# Altium PCB V3Lights.PcbDoc
Units mm, origin at the board's own origin, x right, y up, seen from the top; angles counter-clockwise.
Board outline 80 x 50 mm, 2 copper layers (Top Layer, Bottom Layer), stack 1.671 mm thick; 31 components, 16 nets, 72 pads, 7 vias.
Unrouted connection lines stored in the file: 7.
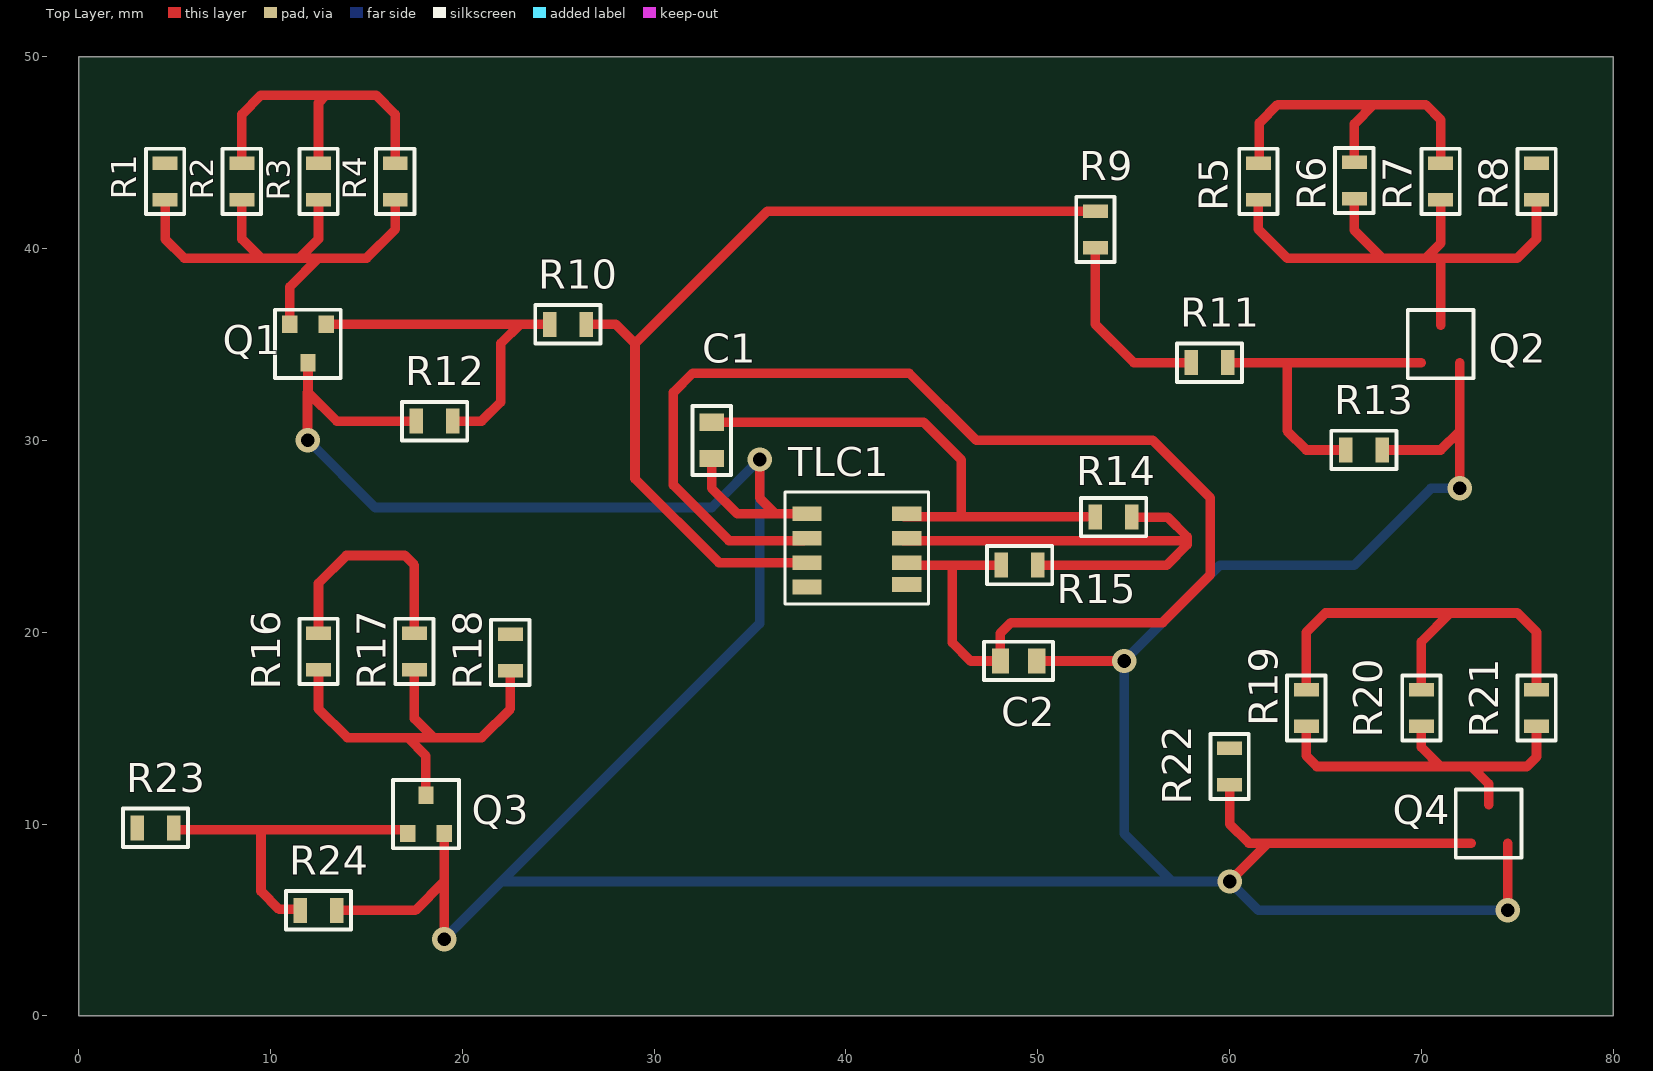
[diagram p0: Top Layer view]
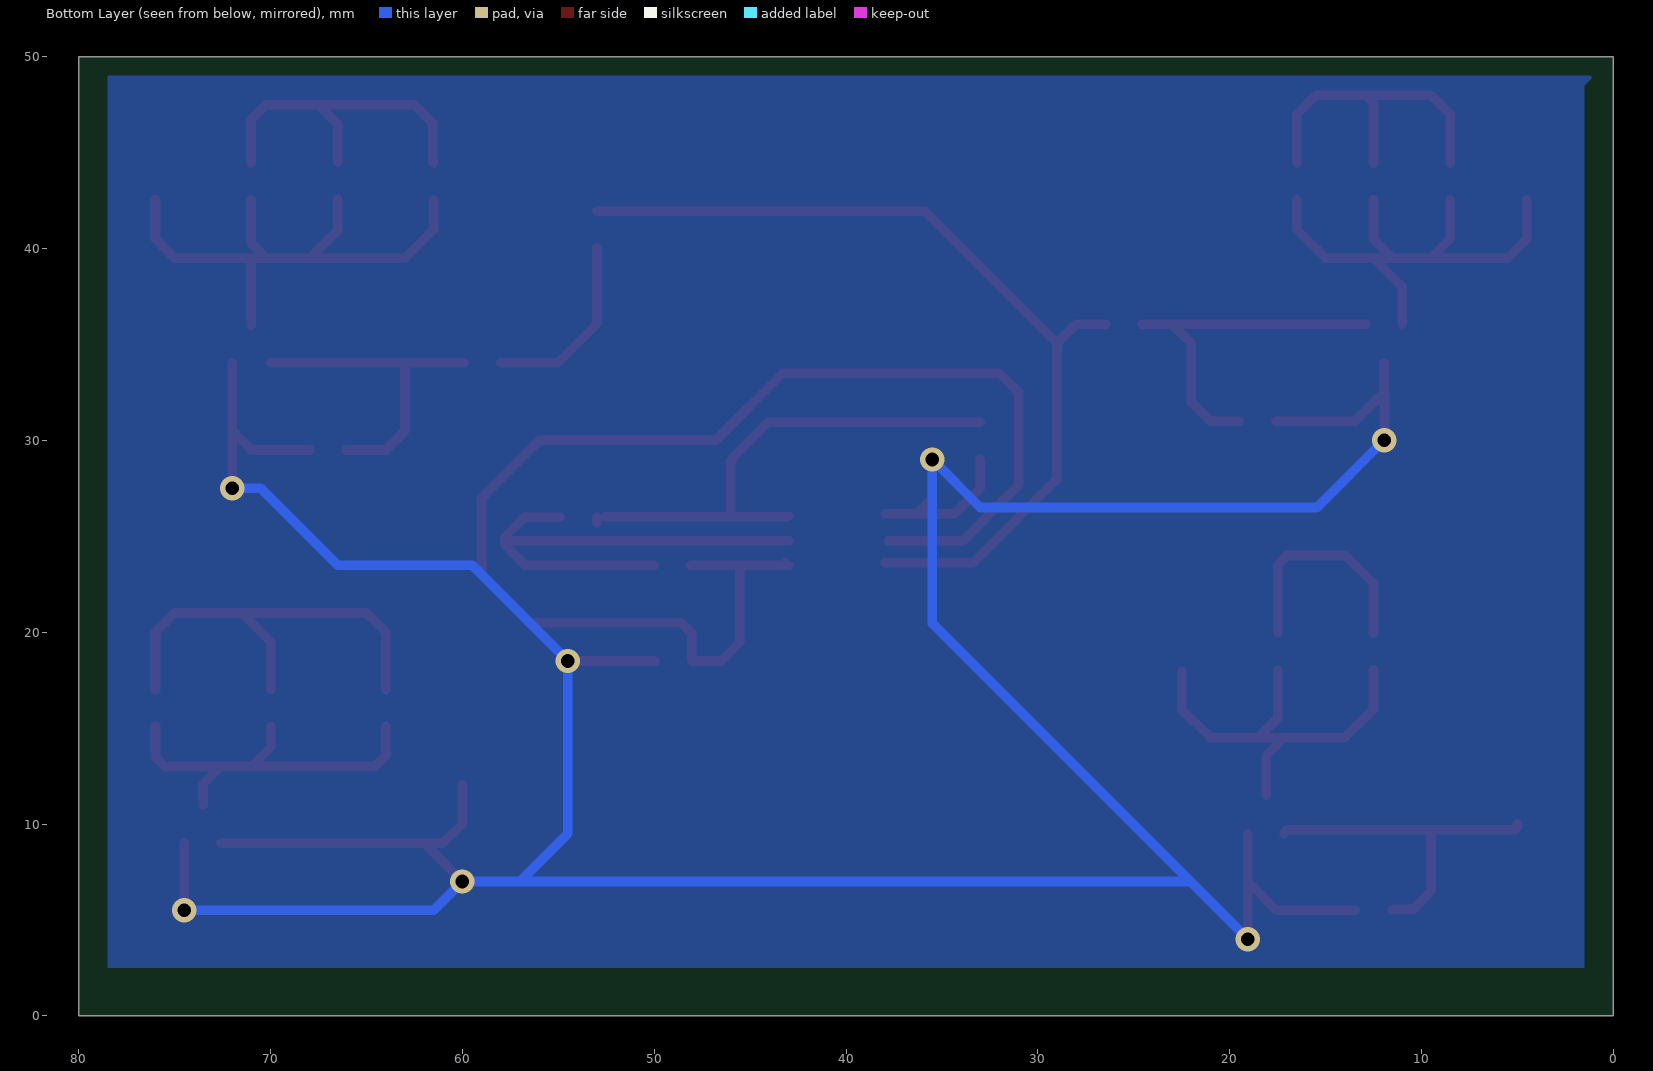
[diagram p1: Bottom Layer view, seen from below]
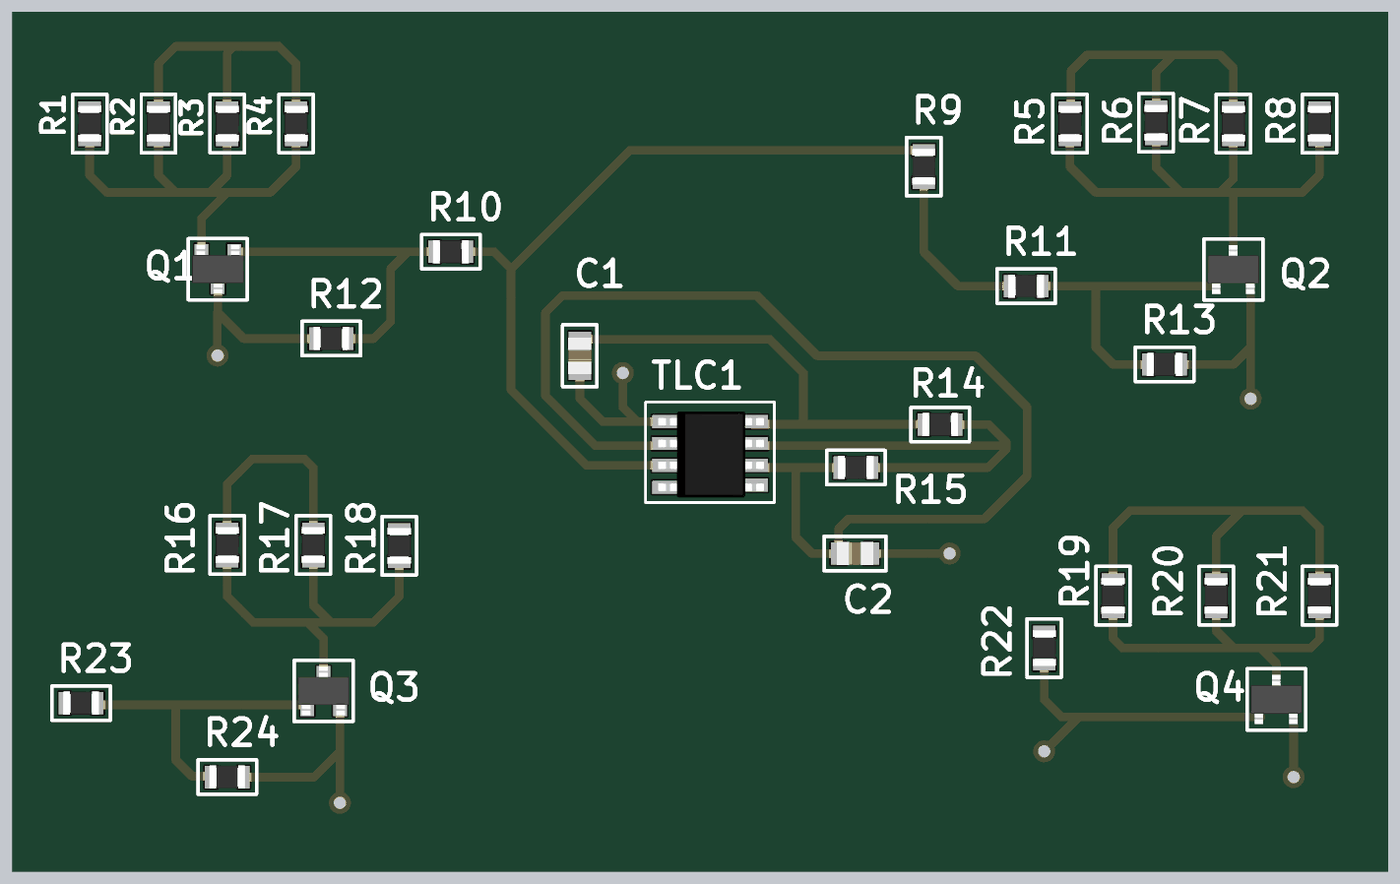
[diagram p2: 3D render of the assembled board from above, using the file's embedded part models]

## Layer stack, top to bottom
Top Solder: solder mask 0.0102, Solder Resist, Dk 3.5
Top Layer: signal copper 0.0356
Dielectric 1: dielectric 1.6, FR-4, Dk 4.8
Bottom Layer: signal copper 0.0356
Bottom Solder: solder mask 0.0102, Solder Resist, Dk 3.5

## Board outline
0,50 80,50 80,0 0,0

## Design rules (kind name [scope] priority, off if disabled: settings)
Clearance [All] p1: gap=0.3 ignorepadtopadclearanceinfootprint=FALSE
PolygonConnect [All] p1: connectstyle=Relief reliefconductorwidth=0.254 reliefentries=4 polygonreliefangle="90 Angle" airgapwidth=0.254
RoutingVias [All] p1: holewidth=0.3 width=0.6 viastyle="Through Hole" minholewidth=0.3 minwidth=0.6 maxholewidth=0.3 maxwidth=0.6
SolderMaskExpansion [All] p1: expansion=0.102
Width [All] p1: maxlimit=1 minlimit=0.3 preferedwidth=0.5
30 further rules are at their usual default settings.

## Components (designator, comment, footprint, x,y, rotation, side; value= is the part's Value field where it differs from the comment)
C1 "0.1uF" C0805 33,30 r90 top
C2 "10uF" C0805 49,18.5 r0 top
Q1 "DMG6968U" "MOSFET DMG6968UDICT-ND"#1 12.9,36.05 r270 top
Q2 "DMG6968U" "MOSFET DMG6968UDICT-ND"#2 70.05,34 r90 top
Q3 "DMG6968U" "MOSFET DMG6968UDICT-ND"#1 17.15,9.5 r90 top
Q4 "DMG6968U" "MOSFET DMG6968UDICT-ND"#2 72.55,9 r90 top
R1 "470" R0805 4.5,43.5 r270 top
R2 "470" R0805 8.5,43.5 r90 top
R3 "470" R0805 12.5,43.5 r270 top
R4 "470" R0805 16.5,43.5 r90 top
R5 "470" R0805 61.5,43.5 r90 top
R6 "470" R0805 66.5,43.55 r90 top
R7 "470" R0805 71,43.5 r90 top
R8 "470" R0805 76,43.5 r90 top
R9 "10K" R0805 53,41 r90 top
R10 "1K" R0805 25.5,36.05 r0 top
R11 "1K" R0805 58.95,34.05 r0 top
R12 "10K" R0805 18.55,31 r0 top
R13 "10K" R0805 67,29.5 r0 top
R14 "22k" R0805 53.95,26 r0 top
R15 "47k" R0805 49.05,23.5 r0 top
R16 "470" R0805 12.5,19 r90 top
R17 "470" R0805 17.5,19 r90 top
R18 "470" R0805 22.5,18.95 r90 top
R19 "470" R0805 64,16.05 r90 top
R20 "470" R0805 70,16.05 r90 top
R21 "470" R0805 76,16.05 r90 top
R22 "10K" R0805 60,13 r90 top
R23 "1K" R0805 4,9.8 r0 top
R24 "10K" R0805 12.5,5.5 r0 top
TLC1 "TLC555IP_TIMER" TLC555IP 40.5,24.77 r0 top

## Footprints (in the part's own frame and the unit in brackets; to place one, negate y for a bottom-side part, rotate by r counter-clockwise, add the part's x,y. Pads: shape width x height; smd on the part's side, far side on the other; paste and mask are expansions set on the pad)
C0805 [mm]
  rect 0.9x1.3 smd: 1(-0.95,0) 2(0.95,0)
  silkscreen extent -1.8,-1 1.8,1, body extent -1.05,-0.67 1.05,0.67, height 0.94
"MOSFET DMG6968UDICT-ND"#1 [mm]
  rect 0.9x0.8 smd: 1(0,0) 2(2,-0.95) 3(0,-1.9)
  silkscreen extent -0.76,-2.67 2.79,0.76, body extent -0.4,-2.44 2.43,0.56, height 1.2
"MOSFET DMG6968UDICT-ND"#2 [mm]
  rect 0.9x0.8 on Mech1: 1(0,0) 2(2,-0.95) 3(0,-1.9)
  silkscreen extent -0.76,-2.67 2.79,0.76, body extent -0.4,-2.44 2.43,0.56, height 1.2
R0805 [mm]
  rect 0.7x1.3 smd: 1(-0.95,0) 2(0.95,0)
  silkscreen extent -1.7,-1 1.7,1, body extent -1.05,-0.67 1.05,0.68, height 0.6
TLC555IP [mil]
  rect 60x30 smd: 1(-100,55) 2(-100,5) 3(-100,-45) 4(-100,-95) 5(105,-90) 6(105,-45) 7(105,5) 8(105,55)
  silkscreen extent -145,-130 150,100, body extent -116,-118 126,78, height 79

## Part data
C1: library part CL21B104KBCWPNC, "CAP CER 0.1UF 50V X7R 0805", Capacitance=100nF, Case/Package=0805, Case Code (Metric)=2012, Manufacturer=Samsung, Max Operating Temperature=125°C, Min Operating Temperature=-55°C, Ratings=AEC-Q200, Supplier Part Number 1=1276-6557-1-ND, Tolerance=10%, Voltage Rating=50V, Case Code (Imperial)=0805, Category=Capacitors, Features="Soft Termination", Length=0.079inch, Manufacturer Part Number=CL21B104KBCWPNC, Mount="Surface Mount", Packaging="Tape and Reel", Pricing 1="1 = 0.10000, 10 = 0.06700, 100 = 0.02990, 500 = 0.02138, 1000 = 0.01680 (USD)", RoHS=Yes, Stock 1=6545, Supplier 1=Digi-Key, Thickness=0.053inch, Width=0.049inch
C2: library part C0805C106K8PACTU, "CAP CER 10UF 10V X5R 0805", Capacitance=1uF, Case/Package=0805, Case Code (Metric)=2012, Dielectric=X7R, Manufacturer=Samsung, Manufacturer Part Number=CL21B105KAFNNNE, Max Operating Temperature=125°C, Min Operating Temperature=-55°C, Package Quantity=1, Supplier Part Number 1=399-4925-1-ND, Tolerance=10%, Voltage=25V, Case Code (Imperial)=0805, Category=Capacitors, ComponentLink1Description=https://www.digikey.ca/product-detail/en/kemet/C0805C106K8PACTU/399-4925-1-ND/1090920, ComponentLink1URL=https://www.digikey.ca/product-detail/en/kemet/C0805C106K8PACTU/399-4925-1-ND/1090920, Contact Plating=Tin, Depth=1.25mm, Height=1.25mm, Lead Free="Lead Free", Length=2mm, Mount="Surface Mount", Packaging="Tape and Reel", Radiation Hardening=No, RoHS=Yes, Supplier 1=Digi-Key, Thickness=0.053inch, Voltage Rating=25V, Voltage Rating (DC)=25V, Width=0.049inch
Q1 Q2 Q3 Q4: library part DMG6968U-7, "MOSFET N-CH 20V 6.5A SOT-23", Case/Package=SOT-23, Continuous Drain Current (ID)=6.5A, Drain to Source Breakdown Voltage=20V, Drain to Source Resistance=25mR, Gate to Source Voltage (Vgs)=12V, Input Capacitance=151pF, Manufacturer=Diodes, Max Operating Temperature=150°C, Max Power Dissipation=1.3W, Min Operating Temperature=-55°C, On-State Resistance=36mR, Package Quantity=3000, Supplier Part Number 1=DMG6968UDICT-ND, Threshold Voltage=500mV, Category="Discrete Semiconductor Products", ComponentLink1Description=https://datasheet.ciiva.com/5774/ds31738-5774992.pdf?src-supplier=Farnell, ComponentLink1URL=https://datasheet.ciiva.com/5774/ds31738-5774992.pdf?src-supplier=Farnell, ComponentLink2Description=https://datasheet.ciiva.com/26789/dmg6968u-7-26789941.pdf?src-supplier=IIIC, ComponentLink2URL=https://datasheet.ciiva.com/26789/dmg6968u-7-26789941.pdf?src-supplier=IIIC, ComponentLink3Description=https://datasheet.ciiva.com/935/ds31738-935016.pdf?src-supplier=Digi-Key, ComponentLink3URL=https://datasheet.ciiva.com/935/ds31738-935016.pdf?src-supplier=Digi-Key, ComponentLink4Description=https://datasheet.ciiva.com/935/ds31738-935018.pdf?src-supplier=Digi-Key, ComponentLink4URL=https://datasheet.ciiva.com/935/ds31738-935018.pdf?src-supplier=Digi-Key, ComponentLink5Description=https://datasheet.ciiva.com/935/ds31738-935017.pdf?src-supplier=Digi-Key, ComponentLink5URL=https://datasheet.ciiva.com/935/ds31738-935017.pdf?src-supplier=Digi-Key, ComponentLink6Description=https://datasheet.ciiva.com/22712/1915638-22712395.pdf?src-supplier=Element14, ComponentLink6URL=https://datasheet.ciiva.com/22712/1915638-22712395.pdf?src-supplier=Element14, Drain to Source Voltage (Vdss)=20V, Element Configuration=Single, Fall Time=205ns, Height=1mm, Lead Free="Lead Free", Length=2.9mm, Manufacturer Part Number=DMG6968U-7, Mount="Surface Mount", Nominal Vgs=500mV, Number of Channels=1, Number of Elements=1, Number of Pins=3, Packaging="Tape and Reel", Power Dissipation=1.3W, Pricing 1="1 = 0.59000, 10 = 0.41800, 100 = 0.27420, 500 = 0.16202, 1000 = 0.12463 (USD)", Radiation Hardening=No, Rds On Max=25mR, REACH SVHC="No SVHC", Rise Time=66ns, RoHS=Yes, Stock 1=169109, Supplier 1=Digi-Key, Turn-Off Delay Time=613ns, Turn-On Delay Time=54ns, Weight=0.000282oz, Width=1.3mm
R1 R2 R3 R4 R5 R6 R7 R8 R16 R17 R18 R19 R20 R21: library part ERJ6ENF470V
R9 R12 R13 R22 R24: library part ERJ6ENF1002V, "RES SMD 10K OHM 1% 1/8W 0805", Case/Package=0805, Manufacturer=Yageo, Manufacturer Part Number=ERJ-6ENF1002V, Max Operating Temperature=155°C, Min Operating Temperature=-55°C, Power Rating=125mW, Resistance=10000R, Supplier Part Number 1=P10.0KCCT-ND, Temperature Coefficient=100ppm/°C, Tolerance=1%, Voltage Rating (DC)=150V, Category=Resistors, ComponentLink1Description=https://datasheet.ciiva.com/27056/2078477-27056611.pdf?src-supplier=Jameco, ComponentLink1URL=https://datasheet.ciiva.com/27056/2078477-27056611.pdf?src-supplier=Jameco, Depth=1.25mm, Height=0.5mm, Lead Free="Lead Free", Length=2mm, Mount="Surface Mount", Number of Pins=2, Packaging="Tape and Reel", Pricing 1="1 = 0.100000, 10 = 0.081000, 100 = 0.031100, 1000 = 0.013670, 2500 = 0.011810 (USD)", REACH SVHC="No SVHC", RoHS=No, Stock 1=3342401, Supplier 1=Digi-Key, Width=1.25mm
R10 R11 R23: library part ERJ6ENF1001V, "RES SMD 1K OHM 1% 1/8W 0805", Case/Package=0805, Case Code (Metric)=2012, Manufacturer=Panasonic, Max Operating Temperature=155°C, Max Power Dissipation=125mW, Min Operating Temperature=-55°C, Package Quantity=1, Resistance=1kR, Supplier Part Number 1=P1.00KCCT-ND, Temperature Coefficient=100ppm/°C, Tolerance=1%, Voltage Rating=150V, Case Code (Imperial)=0805, Category=Resistors, ComponentLink1Description=https://datasheet.ciiva.com/34303/1988962-34303619.pdf?src-supplier=Jameco, ComponentLink1URL=https://datasheet.ciiva.com/34303/1988962-34303619.pdf?src-supplier=Jameco, ComponentLink2Description=https://datasheet.ciiva.com/11808/0900766b80f80784-11808500.pdf?src-supplier=RSComponents, ComponentLink2URL=https://datasheet.ciiva.com/11808/0900766b80f80784-11808500.pdf?src-supplier=RSComponents, ComponentLink3Description=https://datasheet.ciiva.com/28532/426256-28532134.pdf?src-supplier=Element14, ComponentLink3URL=https://datasheet.ciiva.com/28532/426256-28532134.pdf?src-supplier=Element14, ComponentLink4Description=https://datasheet.ciiva.com/30051/aoa0000ce2-30051974.pdf?src-supplier=Onlinecomponents.com, ComponentLink4URL=https://datasheet.ciiva.com/30051/aoa0000ce2-30051974.pdf?src-supplier=Onlinecomponents.com, ComponentLink5Description=https://datasheet.ciiva.com/16774/70260748-16774249.pdf?src-supplier=Allied+Electronics, ComponentLink5URL=https://datasheet.ciiva.com/16774/70260748-16774249.pdf?src-supplier=Allied+Electronics, ComponentLink6Description=https://datasheet.ciiva.com/46373/1678782-46373337.pdf?src-supplier=Element14, ComponentLink6URL=https://datasheet.ciiva.com/46373/1678782-46373337.pdf?src-supplier=Element14, ComponentLink7Description=https://datasheet.ciiva.com/46373/1678782-46373338.pdf?src-supplier=Element14, ComponentLink7URL=https://datasheet.ciiva.com/46373/1678782-46373338.pdf?src-supplier=Element14, ComponentLink8Description=https://datasheet.ciiva.com/48532/aoa0000ce2-48532156.pdf?src-supplier=Avnet, ComponentLink8URL=https://datasheet.ciiva.com/48532/aoa0000ce2-48532156.pdf?src-supplier=Avnet, ComponentLink9Description=https://datasheet.ciiva.com/7942/426256-7942429.pdf?src-supplier=Element14, ComponentLink9URL=https://datasheet.ciiva.com/7942/426256-7942429.pdf?src-supplier=Element14, ComponentLink10Description=https://datasheet.ciiva.com/16199/aoa0000ce2-16199262.pdf?src-supplier=Future+Electronics, ComponentLink10URL=https://datasheet.ciiva.com/16199/aoa0000ce2-16199262.pdf?src-supplier=Future+Electronics, ComponentLink11Description=https://datasheet.ciiva.com/9117/aoa0000ce2-9117391.pdf?src-supplier=Avnet, ComponentLink11URL=https://datasheet.ciiva.com/9117/aoa0000ce2-9117391.pdf?src-supplier=Avnet, ComponentLink12Description=https://datasheet.ciiva.com/16523/aoa0000ce2-16523855.pdf?src-supplier=Avnet+Asia, ComponentLink12URL=https://datasheet.ciiva.com/16523/aoa0000ce2-16523855.pdf?src-supplier=Avnet+Asia, Composition="Thick Film", Contact Plating=Tin, Depth=1.25mm, Features="Automotive AEC-Q200", Height=0.6mm, Lead Free="Lead Free", Length=2mm, Manufacturer Part Number=ERJ6ENF1001V, Military Standard=Not, Mount="Surface Mount", Number of Pins=2, Number of Terminations=2, Packaging="Tape and Reel", Power Rating=125mW, Pricing 1="1 = 0.100000, 10 = 0.081000, 100 = 0.031100, 1000 = 0.013670, 2500 = 0.011810 (USD)", Radiation Hardening=No, REACH SVHC="No SVHC", RoHS=Yes, Stock 1=946321, Supplier 1=Digi-Key, Termination=SMD/SMT, Voltage Rating (DC)=150V, Width=0.049inch
R14: library part ERJ6ENF22000V
R15: library part ERJ6ENF47000V
TLC1: Supplier Part Number 1=296-1858-5-ND, Category 1="555 Timer", Supplier 1=Digi-Key

## Via types
v1: diameter 1.27, hole 0.711, Top Layer to Bottom Layer, tented both sides, 7 vias

## Nets (pads, with @x,y where several pads share a name; then routed paths per layer and width w, separated by ;. In a path a pad name is that pad's centre, name@x,y a point inside that pad or via, vN(x,y) a via of type N, cw(c..) or ccw(c..) an arc to the next point about the centre after c; other vN are vias at no path point)
D8: R1.1 R8.2
D11: R18.2 R22.2 R23.1
D14: R2.2 R3.1 R4.2 R5.2 R6.2 R7.2 R16.2 R17.2 R19.2 R20.2 R21.2 | length 71
  Top Layer w0.5: R2.2 8.5,47 9.5,48 12.9,48 ; R16.2 12.5,22.55 13.95,24 17,24 17.5,23.5 R17.2 ; R3.1 12.5,47.6 12.9,48 ; R4.2 16.5,47 15.5,48 12.9,48 ; R5.2 61.55,44.5 61.55,46.55 62.5,47.5 67.5,47.5 ; R19.2 64,20 65,21 71.5,21 ; R6.2 66.5,46.5 67.5,47.5 ; R20.2 70,19.5 71.5,21 ; R7.2 71,46.725 70.225,47.5 67.5,47.5 ; R21.2 76,20 75,21 71.5,21
GND: C1.1 C2.2 Q1.2 Q3.3 R12.1 R13.2 R22.1 R24.2 TLC1.1 | length 213.9
  Top Layer w0.5: 11.925,32.5 11.925,30.025 v1(11.937,30.013) ; Q1.2 11.95,32.5 13.45,31 R12.1 ; R24.2 17.55,5.5 19.05,7 ; v1(19.05,4) 19.05,7 ; Q3.3 19.05,7 ; C1.1 33,27.5 34.333,26.167 36.333,26.167 ; v1(35.5,29) 35.5,27 36.333,26.167 ; TLC1.1 36.333,26.167 ; C2.2 v1(54.5,18.5) ; v1(60,7) 62,9 ; R22.1 60,10 61,9 62,9 ; R13.2 71,29.5 72,30.5 ; v1(72,27.5) 72,30.5 ; 72,34.05 72,30.5 ; 72.6,9 62,9 ; v1(74.5,5.5) 74.5,9
  Bottom Layer w0.5: v1(11.937,30.013) 15.45,26.5 33,26.5 v1(35.5,29) 35.5,20.45 22.05,7 ; v1(19.05,4) 22.05,7 ; v1(72,27.5) 70.5,27.5 66.5,23.5 59.5,23.5 v1(54.5,18.5) 54.5,9.5 57,7 ; v1(74.5,5.5) 61.5,5.5 v1(60,7) 57,7 ; 22.05,7 57,7
NetC1_2: C1.2 R14.1 TLC1.8 | length 26.6
  Top Layer w0.5: C1.2 44.05,30.95 46,29 46,26.02 ; TLC1.8@43,26.04 43.02,26.02 46,26.02 ; 52.55,26.02 46,26.02 ; R14.1@53,25.7 R14.1
NetC2_1: C2.1 R15.1 TLC1.2 TLC1.6 | length 73.8
  Top Layer w0.5: TLC1.2@37.793,24.77 33.901,24.77 31,27.671 31,32.5 32,33.5 43.298,33.5 46.798,30 56,30 59,27 59,23 56.5,20.5 48.6,20.5 48.05,19.95 C2.1 46.5,18.5 45.55,19.45 45.55,23.5 ; TLC1.6@43,23.5 TLC1.6@43.294,23.5 ; TLC1.6 TLC1.6@43.294,23.5 ; TLC1.6@43.298,23.496 TLC1.6@43.294,23.5 ; R15.1 45.55,23.5 ; TLC1.6@43.294,23.5 45.55,23.5
NetQ1_1: Q1.1 R10.1 R12.2 | length 19
  Top Layer w0.5: Q1.1 23,36.05 ; R12.2 21,31 22,32 22,35.05 23,36.05 ; R10.1 23,36.05
NetQ1_3: Q1.3 R1.2 R2.1 R3.2 R4.1 | length 27.6
  Top Layer w0.5: R1.2 4.5,40.5 5.5,39.5 9.5,39.5 ; R2.1 8.5,40.5 9.5,39.5 ; Q1.3 11,38 12.5,39.5 ; R3.2 12.5,40.5 11.5,39.5 ; R4.1 16.5,41 15,39.5 12.5,39.5 ; 9.5,39.5 11.5,39.5 ; 11.5,39.5 12.5,39.5
NetQ2_1: R11.2 R13.1 | length 17.1
  Top Layer w0.5: R11.2 63,34.05 ; R13.1 64,29.5 63,30.5 63,34.05 ; 70,34.05 63,34.05
NetQ2_2: R5.1 R6.1 R7.1 R8.1 | length 29.7
  Top Layer w0.5: R5.1 61.5,41 63,39.5 67.95,39.5 ; R6.1 66.5,40.95 67.95,39.5 ; 71,36 71,39.5 ; R7.1 71,40.275 70.225,39.5 ; R8.1 76,40.5 75,39.5 71,39.5 ; 67.95,39.5 70.225,39.5 ; 70.225,39.5 71,39.5
NetQ3_1: Q3.1 R23.2 R24.1 | length 18.2
  Top Layer w0.5: R23.2@5,10 5,9.8 5.1,9.7 9.5,9.7 ; R24.1 11.5,5.55 10.45,5.55 9.5,6.5 9.5,9.7 ; Q3.1 17.15,9.55 17,9.7 9.5,9.7
NetQ3_2: Q3.2 R16.1 R17.1 R18.1 | length 22.7
  Top Layer w0.5: R16.1 12.5,16 14,14.5 17.15,14.5 ; R17.1 17.5,15.5 18.5,14.5 ; Q3.2 18.1,13.55 17.15,14.5 ; R18.1 22.5,16 21,14.5 18.5,14.5 ; 17.15,14.5 18.5,14.5
NetQ4_2: R19.1 R20.1 R21.1 | length 20.5
  Top Layer w0.5: R19.1 64,13.55 64.55,13 71,13 ; R20.1 70,14 71,13 ; 73.5,11 73.5,12.1 72.6,13 ; R21.1 76,13.5 75.5,13 72.6,13 ; 71,13 72.6,13
NetR9_1: R9.1 R11.1 | length 9.8
  Top Layer w0.5: R9.1 53,36.05 55,34.05 R11.1
NetR14_2: R14.2 R15.2 TLC1.7 | length 26.8
  Top Layer w0.5: TLC1.7@43,24.77 57.586,24.77 57.793,24.563 ; R15.2 56.73,23.5 57.793,24.563 ; R14.2 56.77,26 57.793,24.977 57.793,24.77 57.793,24.563
TMR_OUT: R9.2 R10.2 TLC1.3 | length 47.6
  Top Layer w0.5: R10.2 28,36.05 29,35.05 ; TLC1.3 33.373,23.627 29,28 29,35.05 ; R9.2 35.9,41.95 29,35.05
pads on no net: Q2.1 Q2.2 Q2.3 Q4.1 Q4.2 Q4.3 TLC1.4 TLC1.5

## Polygon pours and split planes (outlines as drawn)
no net on Top Layer "Top Layer-No Net" (solid, pour order 0): 1.025,2
GND on Bottom Layer "Bottom Layer-GND" (solid, pour order 2): 1,49 1.5,48.5 1.5,2.5 78.5,2.5 78.5,49